# Altium PCB PCB2.PcbDoc
Units mil, origin at the board's own origin, x right, y up, seen from the top; angles counter-clockwise.
Board outline 3020 x 2355 mil, 2 copper layers (Top Layer, Bottom Layer); 24 components, 11 nets, 108 pads, 4 vias.
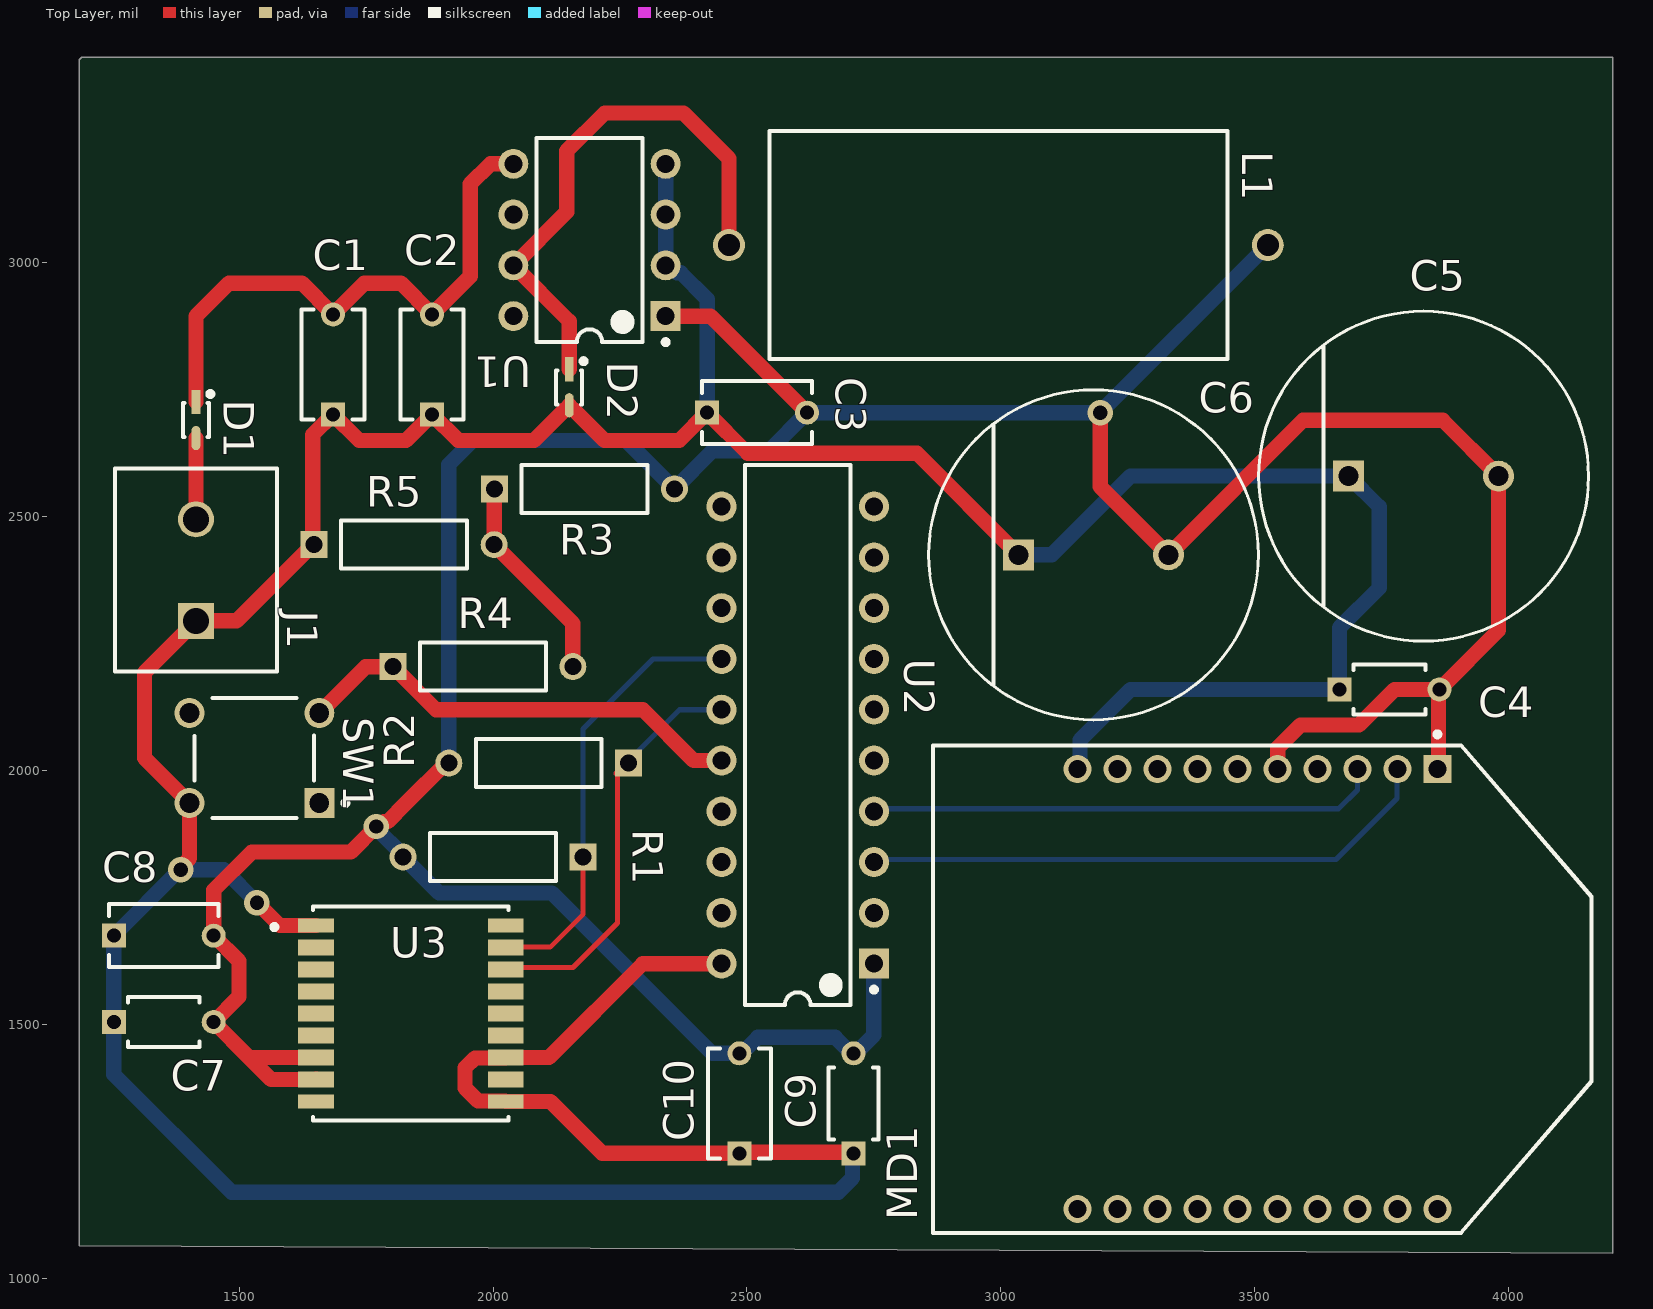
[diagram p0: Top Layer view]
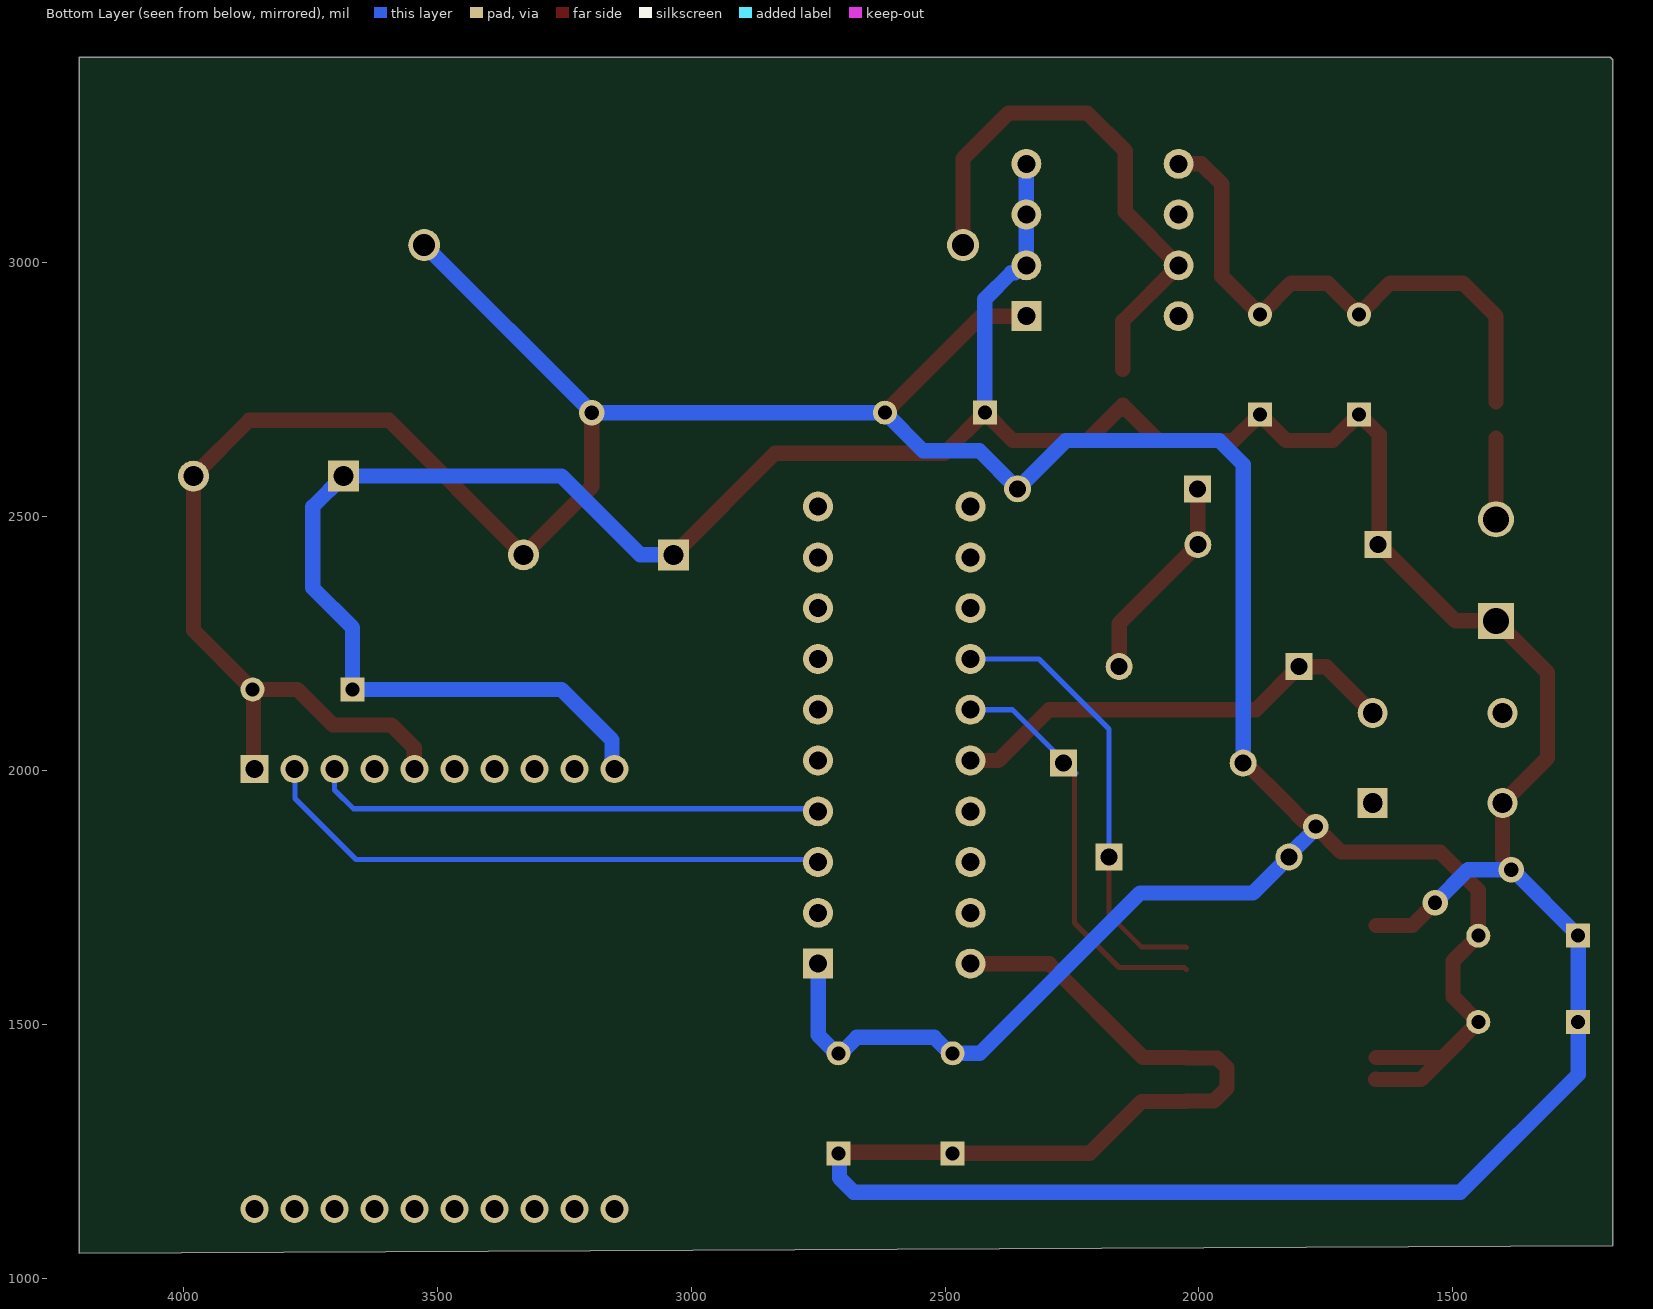
[diagram p1: Bottom Layer view, seen from below]
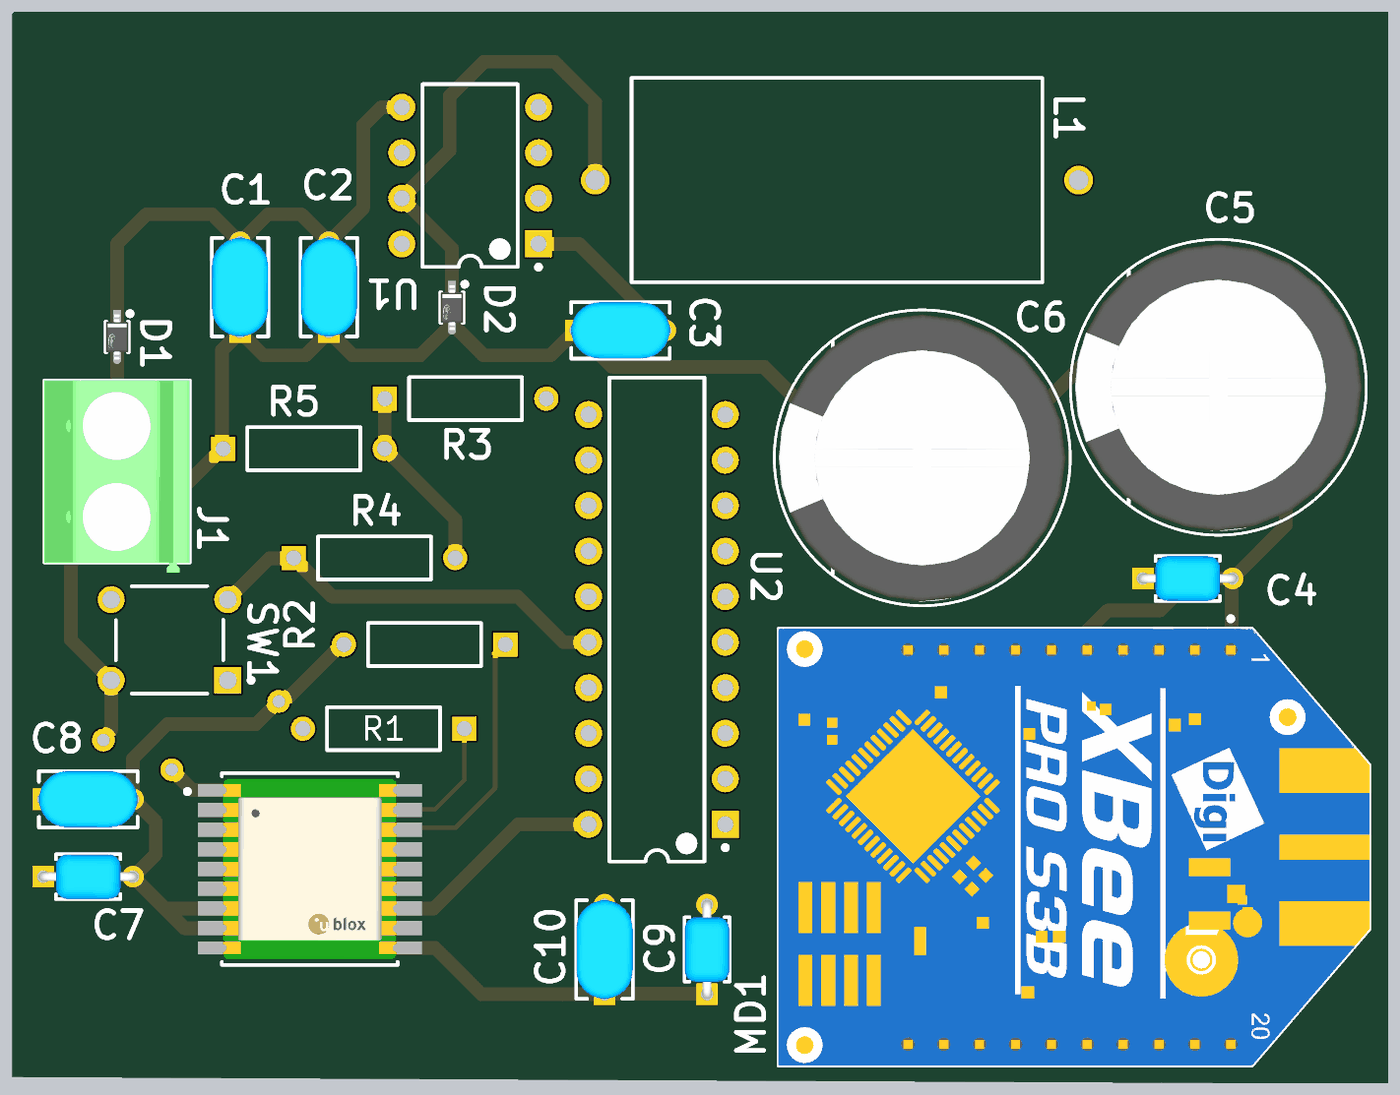
[diagram p2: 3D render of the assembled board from above, using the file's embedded part models]

## Layer stack, top to bottom
Top Solder: solder mask 0.4, Solder Resist, Dk 3.5
Top Layer: signal copper 1.4
Dielectric 1: dielectric 12.6, FR-4, Dk 4.8
Bottom Layer: signal copper 1.4
Bottom Solder: solder mask 0.4, Solder Resist, Dk 3.5

## Board outline
4205,1050 4205,3405 1190,3405 1185,3400 1185,1065

## Design rules (kind name [scope] priority, off if disabled: settings)
Clearance [All] p1: gap=5 ignorepadtopadclearanceinfootprint=TRUE except(0: Arc-Hole Track-Hole SMDPad-Hole THPad-Hole Via-Hole Fill-Hole Poly-Hole Region-Hole Text-Hole)
ComponentClearance [All] p1 off: gap=10 collisioncheckmode=3 verticalgap=10 showdistances=FALSE
DiffPairsRouting [All] p1: maxlimit=10 minlimit=5 mostfreqgap=10 toplayer_minwidth=15 toplayer_maxwidth=15 toplayer_prefwidth=15 bottomlayer_mingap=10 bottomlayer_minwidth=15 bottomlayer_maxwidth=15 bottomlayer_prefwidth=15 maxuncoupledlength=500
Height [All] p1 off: minheight=0 maxheight=1000 prefheight=500
PolygonConnect [All] p1: connectstyle=Relief reliefconductorwidth=10 reliefentries=4 polygonreliefangle="90 Angle" airgapwidth=10
RoutingVias [All] p1: holewidth=28 width=50 viastyle="Through Hole" minholewidth=28 minwidth=50 maxholewidth=28 maxwidth=50
SolderMaskExpansion [All] p1: expansion=4 istentingtop=FALSE
Width [All] p1: maxlimit=30 minlimit=8 preferedwidth=10 bottomlayer_minwidth=10 minimp=50.000000 maximp=50.000000 favimp=50.000000
26 further rules are at their usual default settings.

## Components (designator, comment, footprint, x,y, rotation, side; value= is the part's Value field where it differs from the comment)
C1 "RDEC71E106K2K1H03B" FP-RDE2M1-MFG 1685,2800 r90 top
C2 "RDEC71E106K2K1H03B" FP-RDE2M1-MFG 1880,2800 r90 top
C3 "RDEC71E106K2K1H03B" FP-RDE2M1-MFG 2520,2705 r0 top
C4 "RCER71E104K0K1H03B" FP-RCE0K1-MFG 3765,2160 r0 top
C5 "EEUFM0J562S" FP-RAD-TH-D_16_0_5-L_20_2-MFG 3832.36,2580 r0 top
C6 "EEUFM0J562S" FP-RAD-TH-D_16_0_5-L_20_2-MFG 3182.36,2425 r0 top
C7 "RCER71E104K0K1H03B" FP-RCE0K1-MFG 1351.57,1505 r0 top
C8 "RDEC71E106K2K1H03B" FP-RDE2M1-MFG 1351.57,1675 r0 top
C9 "RCER71E104K0K1H03B" FP-RCE0K1-MFG 2710,1345 r90 top
C10 "RDEC71E106K2K1H03B" FP-RDE2M1-MFG 2485,1345 r90 top
D1 "BAT60AE6327HTSA1" FP-PG-SOD323-2-IPC_C 1415,2690.45 r270 top
D2 "BAT60AE6327HTSA1" FP-PG-SOD323-2-IPC_C 2150,2755 r270 top
J1 "1729128" PHOE-1729128-2_V 1415,2395 r90 top
L1 "AIAP-03-330K" CAPA81-2290X1140_V 2995,3035 r0 top
MD1 "XBP9B-DMUTB002" FP-XBP9B-DMUTB002-MFG 3515,1570 r270 top
R1 "MFR-25FBF52-22R1" RESA60-630X240 2000,1830 r180 top
R2 "MFR-25FBF52-22R1" RESA60-630X240 2090,2015 r180 top
R3 "MFR-25FBF52-22R1" RESA60-630X240 2180,2555 r0 top
R4 "MFR-25FBF52-22R1" RESA60-630X240 1980,2205 r0 top
R5 "MFR-25FBF52-22R1" RESA60-630X240 1825,2445 r0 top
SW1 "1825910-6" TECO-1825910-6_V 1530,2025 r180 top
U1 "LM2574N-3.3/NOPB" P0008A 2190,3045 r180 top
U2 "MSP430G2553IN20" N0020A 2600,2070 r180 top
U3 "MAX-M8Q-0" FP-MAX-M8Q-0-MFG 1837.99,1521.77 r0 top

## Footprints (in the part's own frame and the unit in brackets; to place one, negate y for a bottom-side part, rotate by r counter-clockwise, add the part's x,y. Pads: shape width x height; smd on the part's side, far side on the other; paste and mask are expansions set on the pad)
CAPA81-2290X1140_V [mm] "Axial Lead, 2-Leads, Dia 11.4mm, Body Length 22.9mm, Pin Spacing 26.95mm"
  round 1.6 hole 1.1: 1(-13.475,0) 2(13.475,0)
  silkscreen extent -11.45,-5.7 11.45,5.7, body extent -11.45,-5.7 11.45,5.7, height 11.4
FP-MAX-M8Q-0-MFG [mm]
  rect 1.8x0.7 smd paste-1000 mask-1000: 1(-4.75,4.4) 9(-4.75,-4.4) 10(4.75,-4.4) 18(4.75,4.4)
  rect 1.8x0.8 smd paste-1000 mask-1000: 2(-4.75,3.3) 3(-4.75,2.2) 4(-4.75,1.1) 5(-4.75,0) 6(-4.75,-1.1) 7(-4.75,-2.2) 8(-4.75,-3.3) 11(4.75,-3.3) 12(4.75,-2.2) 13(4.75,-1.1) 14(4.75,0) 15(4.75,1.1) 16(4.75,2.2) 17(4.75,3.3)
  silkscreen extent -6.95,-5.35 4.9,5.35, body extent -6.35,-5.45 6.35,5.45, height 0.25
FP-PG-SOD323-2-IPC_C [mil]
  rect 47.45x17.16 smd paste+0 mask+0: 1(-35.45,0)
  rrect100% 47.45x17.16 smd paste+0 mask+0: 2(35.45,0)
  silkscreen extent -56,-26 33,33, body extent -63,-29 63,29, height 10
FP-RAD-TH-D_16_0_5-L_20_2-MFG [mm]
  rect 1.55x1.55 hole 1 paste-1000 mask+0: 1(-3.75,0)
  round 1.55 hole 1 paste-1000 mask+0: 2(3.75,0)
  silkscreen extent -8.25,-8.25 8.25,8.25, body extent -8.35,-8.35 8.35,8.35, height 0.25
FP-RCE0K1-MFG [mm]
  rect 1.2x1.2 hole 0.7 paste-1000 mask+0: 1(-2.5,0)
  round 1.2 hole 0.7 paste-1000 mask+0: 2(2.5,0)
  silkscreen extent -1.8,-1.25 1.8,1.25, body extent -3.2,-1.35 3.2,1.35, height 0.25
FP-RDE2M1-MFG [mm]
  rect 1.2x1.2 hole 0.7 paste-1000 mask+0: 1(-2.5,0)
  round 1.2 hole 0.7 paste-1000 mask+0: 2(2.5,0)
  silkscreen extent -2.75,-1.58 2.75,1.58, body extent -3.2,-1.68 3.2,1.68, height 0.25
FP-XBP9B-DMUTB002-MFG [mm]
  rect 1.4x1.4 hole 0.9 paste-1000 mask+0: 1(-11,8.75)
  round 1.4 hole 0.9 paste-1000 mask+0: 2(-11,6.75) 3(-11,4.75) 4(-11,2.75) 5(-11,0.75) 6(-11,-1.25) 7(-11,-3.25) 8(-11,-5.25) 9(-11,-7.25) 10(-11,-9.25) 11(11,-9.25) 12(11,-7.25) 13(11,-5.25) 14(11,-3.25) 15(11,-1.25) 16(11,0.75) 17(11,2.75) 18(11,4.75) 19(11,6.75) 20(11,8.75)
  silkscreen extent -12.86,-16.47 12.19,16.47, body extent -12.29,-16.57 12.29,16.57, height 0.25
N0020A [mm] "DIP, 20-Leads, Body 26.9x6.6mm, Pitch 2.54mm"
  rect 1.5x1.5 hole 0.9: 1(-3.81,11.43)
  round 1.5 hole 0.9: 2(-3.81,8.89) 3(-3.81,6.35) 4(-3.81,3.81) 5(-3.81,1.27) 6(-3.81,-1.27) 7(-3.81,-3.81) 8(-3.81,-6.35) 9(-3.81,-8.89) 10(-3.81,-11.43) 11(3.81,-11.43) 12(3.81,-8.89) 13(3.81,-6.35) 14(3.81,-3.81) 15(3.81,-1.27) 16(3.81,1.27) 17(3.81,3.81) 18(3.81,6.35) 19(3.81,8.89) 20(3.81,11.43)
  silkscreen extent -3.94,-13.5 2.65,13.5, body extent -3.95,-13.45 3.95,13.45, height 5.08
P0008A [mm] "DIP, 8-Leads, Body 10.15x6.6mm, Pitch 2.54mm"
  rect 1.5x1.5 hole 0.9: 1(-3.81,3.81)
  round 1.5 hole 0.9: 2(-3.81,1.27) 3(-3.81,-1.27) 4(-3.81,-3.81) 5(3.81,-3.81) 6(3.81,-1.27) 7(3.81,1.27) 8(3.81,3.81)
  silkscreen extent -3.94,-5.1 2.65,5.23, body extent -3.95,-5.07 3.95,5.07, height 5.08
PHOE-1729128-2_V [mm] "Receptacle, 2-Leads, Body 8.1x10.16mm, Pitch 5.08mm"
  rect 1.8x1.8 hole 1.3: 1(-2.54,0)
  round 1.8 hole 1.3: 2(2.54,0)
  silkscreen extent -5.08,-4.05 5.08,4.05, body extent -5.65,-4.05 5.08,4.05, height 10.01
RESA60-630X240 [mm] "Axial Resistor, 2-Leads, Dia 2.4mm, Body Length 6.3mm"
  rect 1.35x1.35 hole 0.85: 1(-4.5,0)
  round 1.35 hole 0.85: 2(4.5,0)
  silkscreen extent -3.15,-1.2 3.15,1.2, body extent -3.15,-1.2 3.15,1.2, height 2.4
TECO-1825910-6_V [mm] "Switch, 4-Leads, Body 5.99x5.99mm"
  rect 1.5x1.5 hole 0.99: 1(-3.25,2.25)
  round 1.5 hole 0.99: 2(3.25,2.25) 3(-3.25,-2.25) 4(3.25,-2.25)
  silkscreen extent -4.68,-2.99 2.99,3, body extent -3,-2.99 2.99,3, height 5

## Part data
C1 C2 C3 C8 C10: library part CMP-06035-050717-1, "Ceramic Capacitor 10uF ±10% 25V X7S Radial", Capacitance=10uF, Case/Package=Radial, Dielectric=X7S, Max Operating Temperature=125°C, Min Operating Temperature=-55°C, Package Quantity=500, Resistor Type=Ceramic, Tolerance=10%, Voltage Rating=25V, Height=4mm, Height - Seated (Max)=0.236inch, Lead Diameter=0.5mm, Lead Free="Lead Free", Lead Pitch=0.197inch, Lead/Base Style="Formed Leads", Length=5.5mm, Mount="Through Hole", Packaging=Bulk, Termination=Radial, Voltage Rating (DC)=25V, Width=0.124inch
C4 C7 C9: library part CMP-06035-038410-1, "Cap Ceramic 100nF 25V X7R ±10% Radial 5mm +125°C Automotive Bulk"
C5 C6: library part CMP-05427-001489-1, "Aluminum Electrolytic Capacitors (Radial Lead Type) 5600uF ±20% 6.3V", Capacitance=5.6mF, Case/Package=Radial, ESR (Equivalent Series Resistance)=17mR, Max Operating Temperature=105°C, Min Operating Temperature=-40°C, Package Quantity=100, Ripple Current=3.3A, Tolerance=20%, Voltage=6.3V, Construction=RADIAL, Diameter=16mm, Dissipation Factor=0.22%, Height=20mm, Height - Seated (Max)=0.866inch, Impedance=17mR, Lead Diameter=0.8mm, Lead Free="Lead Free", Lead Pitch=7.5mm, Lead/Base Style=Straight, Length=20mm, Life (Hours)=5000Hour, Mount="Through Hole", Packaging=Bulk, Radiation Hardening=No, REACH SVHC="No SVHC", RoHS Compliant=Yes, Series=FM, Termination=Radial, Voltage Rating=6.3V, Voltage Rating (DC)=6.3V
D1 D2: library part CMP-32890-000004-1, "DIODE SCHOTTKY 10V 3A SOD323-2", Average Rectified Current=3A, Case/Package=SOD-323-2, Forward Voltage=370mV, Max Operating Temperature=85°C, Max Repetitive Reverse Voltage (Vrrm)=10V, Min Operating Temperature=-55°C, Peak Non-Repetitive Surge Current=5A, Contact Plating=Tin, Current Rating=3A, Element Configuration=Single, Forward Current=3A, Halogen Free="Not Halogen Free", Lead Free="Lead Free", Max Reverse Voltage (DC)=10V, Mount="Surface Mount", Number of Pins=2, Output Current=3A, Packaging="Tape and Reel", Polarity=Standard, Radiation Hardening=No, REACH SVHC="No SVHC", Voltage Rating (DC)=10V
J1: library part CMP-2000-05815-1, "PCB Terminal Block, 13.5 A, 400 V, 2-Pin THD, RoHS, Bulk", Current Rating=13500mA, Manufacturer="Phoenix Contact", Package Description="2-Pin Through Hole Device, Body 8.1 x 10.16 mm, Pitch 5.08 mm", Package Reference=1729128-2, Package Version=03/2015, Voltage Rating=400V, Datasheet URL=https://datasheet.ciiva.com/16046/1729128-16046181.pdf, Datasheet Version=12/2013, Manufacturer URL=http://www.phoenixcontact.com/, Mounting Technology=ThroughHole, No. of Positions=2, No. of Rows=1, Orientation=Horizontal, Package URL=https://www.phoenixcontact.com/online/portal/pi/pxc/product_detail_page/!ut/p/b1/3VdJjqNKFDxLH8AFycySyWY2ozFsEPOMMQaDOX1XedGL_1Vdm5YXJleknhSKeBkvI6EA8ncAo3AYoDhBQGco6KN7VURTdemj9us_IEKEZo_YHiPAEWEFmDGOHMORkqKYCORBZxgL7ZoaZYcbFFUZ3fqxSY6GOuxydWUuHqz1ynmMFygu583Bob0Ewr6Sd_l-5m-kAueHiB0jpRwZwe58wwtkpxtMYd_LmGcDRU02dRNEyWt6Y2ti5pSyJ_reIkzIulrqApdnbT11V5jnCKbYNCvhEM1MCpPByat_X379-iThf08CI5GfOPqfBeS3BRoBOdD55AKVv0iLwCMq-2BrzXWSGRH7pUGD9uwXQjiph3xL0DKQwdGa0JImiIOmBNOestqgwTHSSs2oOep-78apyXQBvNi8ZLaFjvjWvcaUEBu0MC6Wbe-d6mB0FAebo2lUWinqYaZs5DAYzV0RP9yitUjnGJ0iI9xhZkT42OCQNUJJhkgWINNQLP2JFP6OpMg3JCVg70jqHT0lvKOnhHf0lPuOnnLf0VPuWx6_dxwUIvwk5WMkT0kLL1mh61l2yZVSzG3pYV_bqo-mj6uMKwKwdnnW8Jh5RTOJzMOA5c-eJDaZQw4mTMPH02PvS_ZAqNVjVTo2WyYLkwH_KU1mmmG5kjRhDqPXLwwVHvVOjCM60-fpXvTDfMGW1PVFVS1r4e4yVDk4ZdNbkUHvqPqQSeian4UD39fNKmachqdJ1NJbyk8rXT9mXTvPk3oE5meulKGgiruPJek-4I9hTT6G8ZLOyRSm2RRVbThERQad5OS28hdt4YW4vG0stgYYzsWsK4_7y6DZMjJSCqri1kyiZR5vD7pwIrNR7QwPHTcLTI5qT7eRlpHrdGiupYlqQDJ7zy_CND8fWWBoLRXxk1RVcXiBQwbTD4Xi7KL-FuO94t9xaqweXzH, Packing=Bulk, PartNumber=1729128, Pitch=5.08mm, RoHS=TRUE
L1: library part CMP-2000-05083-1, "Axial Power Inductor, 22 uH, +/- 10%, -55 to 125 degC, 2-Pin THD, RoHS, Bulk", Current - Saturation=-, Current Rating=6.07A, DC Resistance (DCR)=26mOhmMax, Frequency - Test=1kHz, Inductance=22µH, Manufacturer=Abracon, Operating Temperature=-55degC~125degC, Package / Case=Axial, Package Description="2-Pin Axial Lead, Dia 11.4 mm, Body Length 22.9 mm", Package Reference=CAPA81-2290X1140, Tolerance=±10%, Category=Inductors,Coils,Chokes, Datasheet URL=http://datasheet.octopart.com/AIAP-03-220K-Abracon-datasheet-38892904.pdf, Datasheet Version=Jan-12, Family=FixedInductors, Frequency - Self Resonant=-, Height - Seated (Max)=-, Manufacturer URL=http://www.abracon.com/, Material - Core=-, Mounting Type=ThroughHole, Packaging=Bulk, Q @ Freq=-, Ratings=-, Series=AIAP-03, Shielding=Unshielded, Size / Dimension="0.450\"Diax0.900\"L(11.40mmx22.90mm)", Type=Wirewound
MD1: library part CMP-84319-000004-1, "RX TXRX MOD ISM < 1GHZ U.FL TH", Case/Package=Module, Current - Receiving=29mA, Current - Transmitting=215mA, Frequency=900MHz, Max Frequency=928MHz, Max Operating Temperature=85°C, Max Supply Voltage=3.6V, Min Frequency=902MHz, Min Operating Temperature=-40°C, Min Supply Voltage=2.4V, Output Power (dBm)=24dBm, Package Quantity=1, Data Rate=200Kbps, Interface=SPI, Memory Size=2KB, Number of Pins=20, Packaging=Bulk, Radiation Hardening=No, RAM Size=2KB, Sensitivity=-101dBm, Series=XBee-Pro™
R1 R2 R3 R4 R5: library part CMP-1659-00076-1, "Axial Resistor, 22.1 Ohm, +/- 1%, 250 mW, -55 to 155 degC, 2-Pin THD, RoHS, Bulk", Case\Package=Axial, Max Operating Temperature="155 degC", Min Operating Temperature="-55 degC", Package Quantity=200, Power Rating="250 mW", Resistance="2.21 kohm", Tolerance=1%, Voltage Rating="250 V", ComponentLink1Description="Manufacturer URL", ComponentLink1URL=http://www.yageo.com/, ComponentLink2Description=Datasheet, ComponentLink2URL=http://www.yageo.com/documents/recent/Yageo%20LR_MFR_2013.pdf, DatasheetVersion=Apr-13, Length="0.248 inch", Mount="Through Hole", PackageDescription="2-Pin Axial Lead, Dia 2.4 mm, Body Length 6.3 mm", PackageReference=MFR-25, Packaging=Bulk, RoHSCompliant=true
SW1: library part CMP-1684-00021-1, "Tact Switch, SPST-NO, 0.05 A, -35 to 85 degC, 4-Pin THD, RoHS, Bulk", Actuator Color=Black, Contact Rating @ Voltage=0.05A@24VDC, Dielectric Strength=500VAC, Manufacturer="TE Connectivity", Maximum AC Voltage Rating=N/A, Maximum Contact Resistance=100mOhm, Maximum DC Voltage Rating=24V, Minimum Insulation Resistance=100MOhm, Operating Temperature=-35to85C, Package Description="4-Pin Through Hole Device, Body 5.99 x 5.99 mm, Pitch 6.5 mm", Package Reference=THD, Actuator Length=1.4mm, Actuator Material=PolybutyleneTerephthalate, Actuator Style=RoundButton, Base Material=N/A, Body Orientation=Straight, Bushing Type=Unthreaded, Contact Material=CopperAlloy, Contact Plating=Silver, Datasheet URL=http://www.te.com/commerce/DocumentDelivery/DDEController?Action=showdoc&DocId=Customer+Drawing%7F1825910%7FC9%7Fpdf%7FEnglish%7FENG_CD_1825910_C9.pdf%7F1825910-6, Datasheet Version="Rev. C9", Dimension=5.99x5mm, Electrical Life=100000Cycles, Family=1825910, Function=MomentaryContact, Housing Material=N/A, Illumination=N/R, Manufacturer URL=http://www.te.com, Mechanical Life=100000Cycles, Mounting=ThroughHole, Packaging=N/A, Part No=1825910-6, Pole Throw Configuration=SPST, Product Weight=N/A, RoHS=Yes, Seal Description=N/A, Seal Location=N/A, Switch Configuration=OFF(ON), Terminal Type=PCPins, Thread Size=N/R
U1: library part CMP-0069-00460-3, "SIMPLE SWITCHER® 0.5A Step-Down Voltage Regulator, 8-pin MDIP, Pb-Free", Manufacturer="Texas Instruments", PackageTopMarking="NSUZXYTTE#*LM2574N*-3.3 P+", PowerWise=N, Code_JEDEC=MS-001-BA, ComponentLink1Description="Datasheet URL", ComponentLink1URL=http://www.ti.com/general/docs/lit/getliterature.tsp?genericPartNumber=LM2574&fileType=pdf, CompType=Switcher, PackageDescription="MDIP, .365 x .250 x .130in, 8 Lead, .100in Pitch", PackageReference=P0008A, PinCount=8, RoHS=Y
U2: library part CMP-0365-00184-2, "16 MHz Mixed Signal Microcontroller with 16 KB Flash, 512 B SRAM and 24 GPIOs, -40 to 85 degC, 20-pin DIP (N), Pb-Free (RoHS)", Frequency(MHz)=16, Manufacturer="Texas Instruments", Temp Sensor=Yes, ADC="10-bit SAR", ADC Channels=8, Brown Out Reset=Yes, Cap touch I/O=Yes, Code_JEDEC=MS-001, Comparators=Yes, ComponentLink1Description="Manufacturer URL", ComponentLink1URL=http://www.ti.com/, ComponentLink2Description=Datasheet, ComponentLink2URL=http://www.ti.com/general/docs/lit/getliterature.tsp?genericPartNumber=MSP430G2553&fileType=pdf, ComponentLink3Description="Package Specification", ComponentLink3URL=http://www.ti.com/litv/pdf/mpds177g, DatasheetVersion=SLAS735G, Eco-Plan="Pb-Free (RoHS)", Flash(KB)=16, GPIO=24, Mounting Technology="Through Hole", PackageDescription="20-Pin Plastic In-Line, Body 25.40 x 6.35 mm, Pitch 2.54 mm", PackageReference=N0020A, PackageVersion=4040049/E, PartNumber=MSP430G2553IN20, SRAM(B)=512, SubFamily="Value Line", Timers - 16-bit=2, USCI_A (UART/LIN/IrDA/SPI)=1, USCI_B (I2C & SPI)=1, Watchdog=Yes
U3: library part CMP-207130-000017-1, "RF RCVR GNSS/GPS 1.575GHZ 18LCC", Case/Package=SMD/SMT, Current - Receiving=23mA, Frequency=1.575GHz, Max Operating Temperature=85°C, Min Operating Temperature=-40°C, Interface=I2C, Packaging="Cut Tape", RoHS Compliant=Yes, Sensitivity=-167dBm

## Via types
v1: diameter 50, hole 28, Top Layer to Bottom Layer, 4 vias

## Nets (pads, with @x,y where several pads share a name; then routed paths per layer and width w, separated by ;. In a path a pad name is that pad's centre, name@x,y a point inside that pad or via, vN(x,y) a via of type N, cw(c..) or ccw(c..) an arc to the next point about the centre after c; other vN are vias at no path point)
NetC1_1: C1.1 C2.1 C3.1 C4.1 C5.1 C6.1 C7.1 C8.1 C9.1 C10.1 D2.2 J1.1 MD1.10 R5.1 SW1.2 U1.2 U1.3 U1.4 U2.20 U3.1 U3.10 U3.12 | length 8919.5
  Top Layer w30: v1@1383.15,1805 v1(1385,1805) 1385,1810.41 1402.05,1827.46 SW1.2 1313.46,2025 1313.46,2193.46 J1.1 1495,2295 1633.43,2433.43 1636.26,2433.43 1645,2442.17 1645,2661.57 C1.1 1736.57,2650 1828.43,2650 C2.1 1931.57,2650 2080.45,2650 2141.27,2710.82 2143.58,2710.82 D2.2@2150,2717.24 ; v1(1535,1740) 1580,1695 U3.1 ; D2.2 D2.2@2150,2717.24 ; U2.20@2450,1619.8 2294.8,1619.8 2110.16,1435.16 U3.12 2024.25,1434.41 1964.41,1434.41 1945,1415 1945,1375 1970.24,1349.76 2023.78,1349.76 U3.10 2113.23,1348.54 2215.2,1246.57 C10.1 ; C10.1@2485,1248.43 C9.1@2710,1248.43 ; C6.1 2834.72,2625 2501.57,2625 C3.1 2366.57,2650 2219.55,2650 2158.73,2710.82 2156.42,2710.82 D2.2@2150,2717.24
  Bottom Layer w30: v1@1383.15,1805 C8.1 C7.1 1253.15,1401.85 1485,1170 2680,1170 2707.85,1197.85 2707.85,1244.42 C9.1 ; v1(1385,1805) 1470,1805 v1(1535,1740) ; U1.4 U1.3 U1.2 2347.86,2995 2362.39,2980.47 2369.53,2980.47 2421.57,2928.43 C3.1 ; C6.1 3100,2425 3255,2580 C5.1 3745,2519.72 3745,2360 3666.57,2281.57 C4.1 3255,2160 3155.63,2060.63 3155.63,2007.88 MD1.10
NetC1_2: C1.2 C2.2 D1.1 U1.5 | length 1126.7
  Top Layer w30: D1.1 1415,2895 1480,2960 1623.43,2960 C1.2 1746.57,2960 1818.43,2960 C2.2 1955,2973.43 1955,3155 1995,3195 U1.5
NetC3_2: C3.2 C4.2 C5.2 C6.2 C7.2 C8.2 C9.2 C10.2 L1.2 MD1.1 MD1.5 R1.2 R2.2 R3.2 U1.1 U2.1 U3.7 U3.8 | length 7596.7
  Top Layer w30: U3.7 1519.84,1435.16 ; U3.8@1651.73,1392.6 U3.8 1563.15,1391.85 1519.84,1435.16 ; R2.2@1910.33,2017.5 1827.83,1935 1792.83,1900 1785.41,1900 1775.41,1890 v1(1770,1890) 1720,1840 1525,1840 1450,1765 C8.2 1500,1625 1500,1555 C7.2 1519.84,1435.16 ; U1.1 2428.43,2895 C3.2 ; C10.2@2480,1443.43 C10.2 ; v1(3195.51,2705) 3195.51,2559.49 C6.2 3595,2690 3870,2690 C5.2 3980,2276.57 C4.2 ; MD1.5 3545,2003.54 3545,2045 3590,2090 3705,2090 3775,2160 C4.2 ; MD1.1 3861.46,2005.04 3861.46,2158.03 C4.2
  Bottom Layer w30: v1@1775.41,1890 v1(1770,1890) 1770,1886.42 1822.83,1833.58 R1.2 1893.56,1759.27 2115.73,1759.27 2431.57,1443.43 C10.2 2489.67,1443.43 2521.24,1475 2673.76,1475 2705.33,1443.43 C9.2 2713.43,1443.43 2749.76,1479.76 U2.1@2749.76,1618.12 ; R2.2 1912.83,2602.83 1960,2650 2262.17,2650 R3.2 2432.17,2630 2543.43,2630 C3.2 v1(3195.51,2705) L1.2
NetD1_2: D1.2 J1.2 | length 160
  Top Layer w30: J1.2 D1.2
NetD2_1: D2.1 L1.1 U1.7 | length 1076.7
  Top Layer w30: D2.1 2150,2885 U1.7 2145,3100 2145,3220 2220,3295 2375,3295 2464.49,3205.51 L1.1
NetMD1_2: MD1.2 U2.3 | length 1138.1
  Bottom Layer w10: U2.3@2750,1825 3520,1825 3660,1825 3780,1945 3780,2002.32 MD1.2
NetMD1_3: MD1.3 U2.4 | length 1008.4
  Bottom Layer w10: U2.4@2750,1925 3470,1925 3665,1925 3702.01,1962.01 MD1.3
NetR1_1: R1.1 U2.14 U3.17 | length 878
  Top Layer w10: U3.17 2025.81,1652.5 2112.5,1652.5 2177.5,1717.5 2177.5,1829.67 R1.1 ; U2.14@2447.5,2222.5 U2.14
  Bottom Layer w10: R1.1 2177.17,2082.17 2315,2220 U2.14
NetR2_1: R2.1 U2.15 U3.16 | length 813.7
  Top Layer w10: U3.16 2029.11,1612.5 2157.5,1612.5 2245,1700 2245,1992.17 R2.1@2242.17,1995
  Bottom Layer w10: R2.1@2242.17,1995 2367.17,2120 U2.15
NetR3_1: R3.1 R4.2 R5.2 | length 414.5
  Top Layer w30: R3.1 2002.5,2554.67 2002.5,2445.33 R5.2 2157.17,2290 R4.2
NetR4_1: R4.1 SW1.3 U2.16 | length 906.5
  Top Layer w30: SW1.3 1748.83,2204.46 1802.3,2204.46 R4.1 1887.83,2120 2295,2120 2395,2020 U2.16
pads on no net: MD1.4 MD1.6 MD1.7 MD1.8 MD1.9 MD1.11 MD1.12 MD1.13 MD1.14 MD1.15 MD1.16 MD1.17 MD1.18 MD1.19 MD1.20 SW1.1 SW1.4 U1.6 U1.8 U2.2 U2.5 U2.6 U2.7 U2.8 U2.9 U2.10 U2.11 U2.12 U2.13 U2.17 U2.18 U2.19 U3.2 U3.3 U3.4 U3.5 U3.6 U3.9 U3.11 U3.13 U3.14 U3.15 U3.18